# Altium PCB SharkPup R1.0.PcbDoc
Units mil, origin at the board's own origin, x right, y up, seen from the top; angles counter-clockwise.
Board outline 6000 x 4000 mil, 2 copper layers (Top Layer, Bottom Layer); 136 components, 95 nets, 489 pads, 92 vias.
Unrouted connection lines stored in the file: 210.
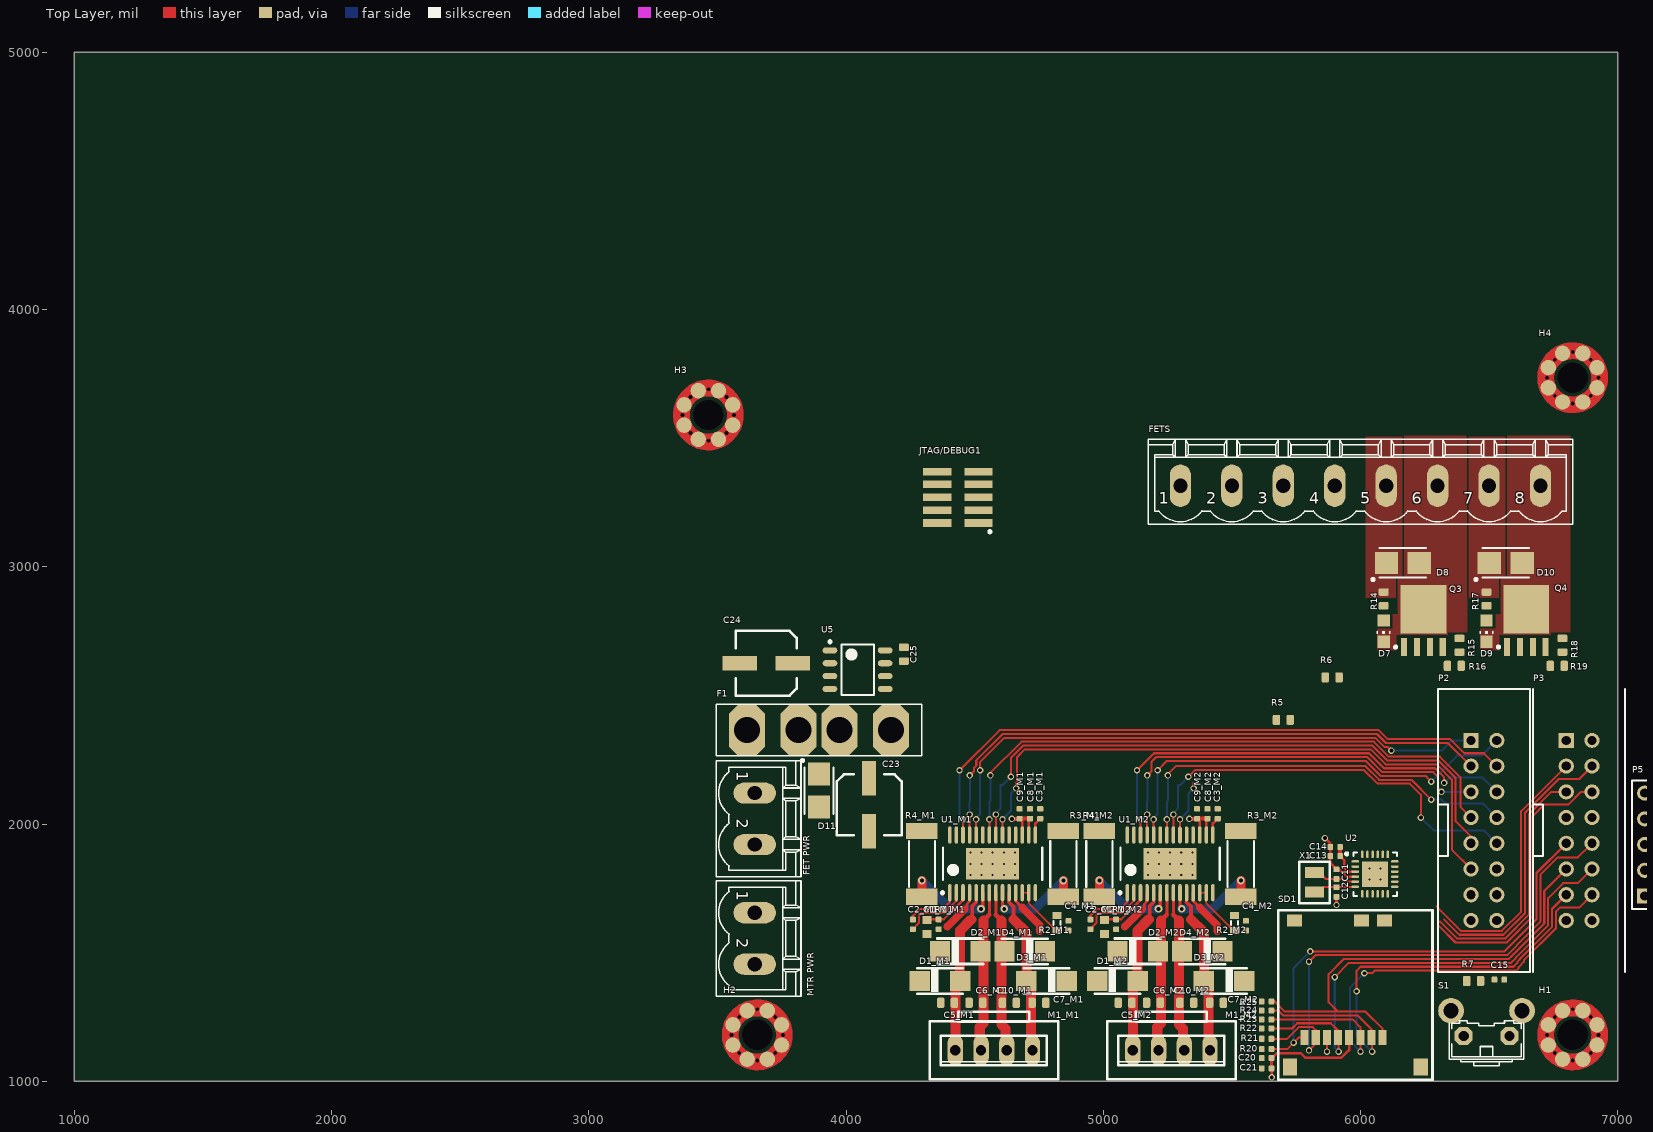
[diagram p0: Top Layer view]
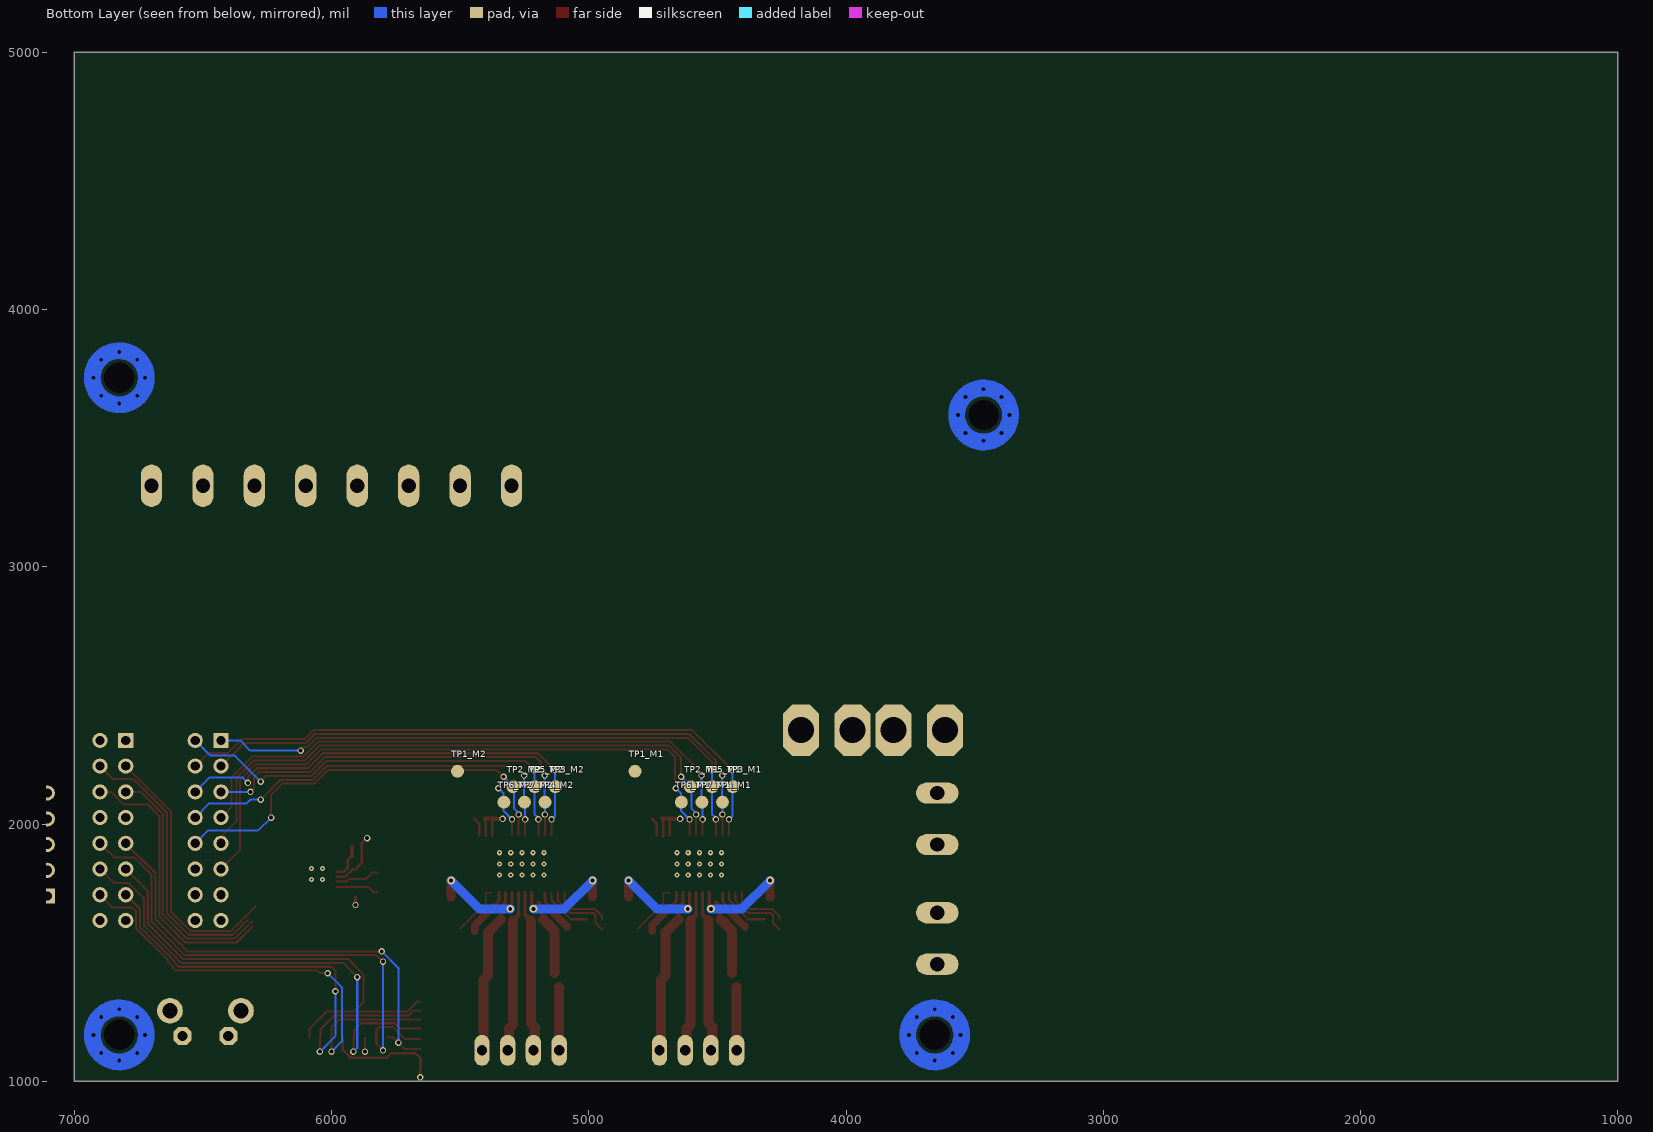
[diagram p1: Bottom Layer view, seen from below]

## Layer stack, top to bottom
Top Solder: solder mask 0.4, Solder Resist, Dk 3.5
Top Layer: signal copper 1.4
Dielectric 1: dielectric 12.6, FR-4, Dk 4.8
Bottom Layer: signal copper 1.4
Bottom Solder: solder mask 0.4, Solder Resist, Dk 3.5

## Board outline
1000,1000 7000,1000 7000,5000 1000,5000

## Design rules (kind name [scope] priority, off if disabled: settings)
Clearance [All] p1: gap=7
ComponentClearance [All] p1: gap=0 collisioncheckmode=3 verticalgap=10 showdistances=FALSE
FanoutControl Fanout_SOIC [(InComponent('U8') AND InComponent('U7'))] p3: bgadir=Out bgaviamode=Centered fanoutstyle=Staggered fanoutdirection=Alternating viagrid=1 // Fanout_SOIC (Default Rule)
FanoutControl Fanout_Small [All] p4: bgadir=Out bgaviamode=Centered fanoutstyle=Auto fanoutdirection=Alternating viagrid=1 // Fanout_Small (Default Rule)
HoleSize [All] p1: absolutevalues=TRUE maxlimit=200 minlimit=15 maxpercent=80.000 minpercent=20.000
MinimumSolderMaskSliver [All] p1 off: minsoldermaskwidth=10
PlaneConnect [All] p1: planeconnectstyle=Direct reliefexpansion=20 reliefentries=4 reliefconductorwidth=10 reliefairgap=10
PolygonConnect [All] p1: connectstyle=Direct reliefconductorwidth=45 reliefentries=4 polygonreliefangle="90 Angle" airgapwidth=10
RoomDefinition TC2 [InComponentClass('TC2')] p1: confinementstyle=ConfineIn formatcopy=TRUE lockcomponents=FALSE outline 7045,6465 8290,6465 8290,6885 7045,6885
RoomDefinition TC1 [InComponentClass('TC1')] p2: confinementstyle=ConfineIn formatcopy=TRUE lockcomponents=FALSE outline 7045,5995 8230,5995 8230,6415 7045,6415
RoomDefinition M2 [InComponentClass('M2')] p3: confinementstyle=ConfineIn formatcopy=TRUE lockcomponents=FALSE outline 5605,1000 5605,2270 4915,2270 4915,1000
RoomDefinition M1 [InComponentClass('M1')] p4: confinementstyle=ConfineIn formatcopy=TRUE lockcomponents=FALSE outline 4915,1000 4915,2270 4225,2270 4225,1000
RoutingVias [All] p1: holewidth=15 width=25 viastyle="Through Hole" minholewidth=15 minwidth=25 maxholewidth=28 maxwidth=50
SilkToSilkClearance [All] p1 off: silktosilkclearance=10
SilkToSolderMaskClearance SilkscreenOverComponentPads [IsPad] p1 off: minsilkscreentomaskgap=10 clearancetoexposedcopper=TRUE
SolderMaskExpansion [All] p1: expansion=4
UnpouredPolygon [All] p1: allowunpoured=FALSE
Width [All] p1: maxlimit=200 minlimit=7 preferedwidth=8 minimp=50.000000 maximp=50.000000 favimp=50.000000
21 further rules are at their usual default settings.

## Classes and differential pairs
net class STEP_BUS[1..2]: STEP_BUS1 STEP_BUS2
net class REF_BUS[1..2]: REF_BUS1 REF_BUS2
net class MOD2E_BUS[1..2]: MOD2E_BUS1 MOD2E_BUS2
net class MOD1E_BUS[1..2]: MOD1E_BUS1 MOD1E_BUS2
net class MOD0E_BUS[1..2]: MOD0E_BUS1 MOD0E_BUS2
net class EN_BUS[1..2]: EN_BUS1 EN_BUS2
net class DIR_BUS[1..2]: DIR_BUS1 DIR_BUS2
channel class TC: TC1 TC2
channel class M: M1 M2
net class TC_CS_BUS[1..2]: TC_CS_BUS1 TC_CS_BUS2
net class SCLK[1..2]: SCLK1 SCLK2
net class MISO[1..2]: MISO1 MISO2
component class "U_MOSFETs and Driver": C16 C17 C18 C19 D5 D6 D7 D8 D9 D10 FETS Q1 Q2 Q3 Q4 R8 R9 R10 R11 R12 R13 R14 R15 R16 R17 R18 R19 TP8 TP9 TP10 TP11 TP12 TP13 U3
component class "U_MCU MKL05 QFN24": C11 C12 C13 C14 C15 JTAG/DEBUG1 R5 R6 R7 S1 U2 X1
component class TC2: C22_TC2 T1_TC2 U4_TC2
component class TC1: C22_TC1 T1_TC1 U4_TC1
component class SharkPup-System: C20 C21 C23 C24 C25 D11 D13 F1 FD1 FD2 FD3 "FET PWR" H1 H2 H3 H4 "Motor Power1" "MTR PWR" P2 P3 P4 P5 R20 R21 R22 R23 R24 R25 SD1 TP14 TP15 U5
component class M2: C1_M2 C2_M2 C3_M2 C4_M2 C5_M2 C6_M2 C7_M2 C8_M2 C9_M2 C10_M2 D1_M2 D2_M2 D3_M2 D4_M2 M1_M2 R1_M2 R2_M2 R3_M2 R4_M2 TP1_M2 TP2_M2 TP3_M2 TP4_M2 TP5_M2 TP6_M2 TP7_M2 U1_M2
component class M1: C1_M1 C2_M1 C3_M1 C4_M1 C5_M1 C6_M1 C7_M1 C8_M1 C9_M1 C10_M1 D1_M1 D2_M1 D3_M1 D4_M1 M1_M1 R1_M1 R2_M1 R3_M1 R4_M1 TP1_M1 TP2_M1 TP3_M1 TP4_M1 TP5_M1 TP6_M1 TP7_M1 U1_M1

## Components (designator, comment, footprint, x,y, rotation, side; value= is the part's Value field where it differs from the comment)
C1_M1 "0603" 1608[0603] 4315,1600 r90 top (schematic designator C1)
C1_M2 "0603" 1608[0603] 5005,1600 r90 top (schematic designator C1)
C2_M1 "0402" C0402 4260,1610 r270 top (schematic designator C2)
C2_M2 "0402" C0402 4950,1610 r270 top (schematic designator C2)
C3_M1 "0402" C0402 4755,2040 r270 top (schematic designator C3)
C3_M2 "0402" C0402 5445,2040 r270 top (schematic designator C3)
C4_M1 "0402" C0402 4865,1605 r270 top (schematic designator C4)
C4_M2 "0402" C0402 5555,1605 r270 top (schematic designator C4)
C5_M1 "10uF" C0603 4395,1305 r180 top (schematic designator C5)
C5_M2 "10uF" C0603 5085,1305 r180 top (schematic designator C5)
C6_M1 "10uF" C0603 4505,1305 r180 top (schematic designator C6)
C6_M2 "10uF" C0603 5195,1305 r180 top (schematic designator C6)
C7_M1 "10uF" C0603 4750,1305 r0 top (schematic designator C7)
C7_M2 "10uF" C0603 5440,1305 r0 top (schematic designator C7)
C8_M1 "0402" C0402 4715,2040 r270 top (schematic designator C8)
C8_M2 "0402" C0402 5405,2040 r270 top (schematic designator C8)
C9_M1 "0402" C0402 4675,2040 r270 top (schematic designator C9)
C9_M2 "0402" C0402 5365,2040 r270 top (schematic designator C9)
C10_M1 "10uF" C0603 4635,1305 r0 top (schematic designator C10)
C10_M2 "10uF" C0603 5325,1305 r0 top (schematic designator C10)
C11 "0402" C0402 5906.77,1805.16 r270 top
C12 "0402" C0402 5906.77,1735.16 r90 top
C13 "0402" C0402 5901.77,1875.16 r0 top
C14 "0402" C0402 5901.77,1910.16 r0 top
C15 "0402" C0402 6540,1395 r180 top
C16 "0402" C0402 11740,4430 r90 top
C17 "0402" C0402 11960,4430 r90 top
C18 "0603" C0603 11310,4415 r90 top
C19 "0603" C0603 11530,4415 r90 top
C20 "0402" C0402 5635,1090 r0 top
C21 "0402" C0402 5635,1050 r0 top
C22_TC1 "0402" C0402 7075,6260 r90 top (schematic designator C22)
C22_TC2 "0402" C0402 7075,6730 r90 top (schematic designator C22)
C23 "EEE-1VA101XP" EEE-1VA101XP 4090,2075 r90 top
C24 "EEE-1VA101XP" EEE-1VA101XP 3690,2625 r0 top
C25 "100nF" C0603 4225,2660 r270 top
D1_M1 "SMAJ30A" SMA-SM 4365,1390 r0 top (schematic designator D1)
D1_M2 "SMAJ30A" SMA-SM 5055,1390 r0 top (schematic designator D1)
D2_M1 "SMAJ30A" SMA-SM 4444,1505 r0 top (schematic designator D2)
D2_M2 "SMAJ30A" SMA-SM 5134,1505 r0 top (schematic designator D2)
D3_M1 "SMAJ30A" SMA-SM 4780,1390 r180 top (schematic designator D3)
D3_M2 "SMAJ30A" SMA-SM 5470,1390 r180 top (schematic designator D3)
D4_M1 "SMAJ30A" SMA-SM 4695,1505 r180 top (schematic designator D4)
D4_M2 "SMAJ30A" SMA-SM 5385,1505 r180 top (schematic designator D4)
D5 "5988140107F" LED2012120 14640,4440 r0 top
D6 "5988140107F" LED2012120 13655,4440 r0 top
D7 "5988140107F" LED2012120 6090,2750 r270 top
D8 "B240A-13-F" SK310A-TP 6165,3015 r180 top
D9 "5988140107F" LED2012120 6490,2750 r270 top
D10 "B240A-13-F" SK310A-TP 6565,3015 r180 top
D11 "SK310A-TP" SK310A-TP 3895,2130 r90 top
F1 "3522-2" "3522-2 - WAVE SOLDER" 3895,2365 r0 top
FD1 "FIDUCIAL" FIDUCIAL-1X2 8855,1300 r0 top
FD2 "FIDUCIAL" FIDUCIAL-1X2 8390,1300 r0 top
FD3 "FIDUCIAL" FIDUCIAL-1X2 8625,1300 r0 top
"FET PWR" "con-phoenix-508 - 2" "MSTBV2 - duplicate" 3645,1820 r270 top
FETS "con-phoenix-508 - 8" MSTBV8 6000,3315 r90 top
H1 "Hole" Wave_hole_3x7-singleSided 6825,1180 r0 top
H2 "Hole" Wave_hole_3x7-singleSided 3655,1180 r0 top
H3 "Hole" Wave_hole_3x7-singleSided 3465,3590 r0 top
H4 "Hole" Wave_hole_3x7-singleSided 6825,3735 r0 top
JTAG/DEBUG1 "ARM Cortex JTAG-DEBUG" FTSH-105-XX-X-DV 4435,3270 r270 top
M1_M1 "Molex 0705430003" 4POL254 4575,1120 r180 top (schematic designator M1)
M1_M2 "Molex 0705430003" 4POL254 5265,1120 r180 top (schematic designator M1)
"MTR PWR" "con-phoenix-508 - 2" "MSTBV2 - duplicate" 3645,1355 r270 top
P2 "302-S161" 302-S161 6530,2325 r270 top
P3 "302-S161" 302-S161 6900,2325 r270 top
P4 "Header 2X2" HDR2X2 7935,1970 r90 top
P5 "Header 5" HDR1X5 7105,1720 r90 top
Q1 "IRML6346TRPBF" IRLML6346 14270,4385 r0 top
Q2 "IRML6346TRPBF" IRLML6346 11140,5500 r90 top
Q3 "PSMN7R0-60YS" PSMN7R0-60YS 6245,2790 r90 top
Q4 "PSMN7R0-60YS" PSMN7R0-60YS 6645,2790 r90 top
R1_M1 "1M" R0402 4360,1610 r270 top (schematic designator R1)
R1_M2 "1M" R0402 5050,1610 r270 top (schematic designator R1)
R2_M1 "0603" J1-0603 4820,1615 r90 top (schematic designator R2)
R2_M2 "0603" J1-0603 5510,1615 r90 top (schematic designator R2)
R3_M1 "2512" Resistor2512 4845,1845 r270 top (schematic designator R3)
R3_M2 "2512" Resistor2512 5535,1845 r270 top (schematic designator R3)
R4_M1 "2512" Resistor2512 4295,1845 r270 top (schematic designator R4)
R4_M2 "2512" Resistor2512 4985,1845 r270 top (schematic designator R4)
R5 "1K" R0603 5700,2405 r0 top
R6 "1K" R0603 5890,2570 r0 top
R7 "1K" R0603 6440,1390 r0 top
R8 "1.8K" R0603 14810,4440 r0 top
R9 "10r" R0603 14450,4440 r0 top
R10 "100K" R0603 14005,4415 r90 top
R11 "1.8K" R0603 13825,4440 r0 top
R12 "10r" R0603 13395,4415 r90 top
R13 "100K" R0603 10430,5150 r180 top
R14 "1.8K" R0603 6090,2875 r90 top
R15 "10r" R0603 6385,2695 r90 top
R16 "100K" R0603 6365,2615 r180 top
R17 "1.8K" R0603 6490,2875 r90 top
R18 "10r" R0603 6785,2695 r90 top
R19 "100K" R0603 6765,2615 r180 top
R20 "2.7K" R0402 5635,1125 r180 top
R21 "2.7K" R0402 5635,1165 r180 top
R22 "2.7K" R0402 5635,1205 r180 top
R23 "2.7K" R0402 5635,1240 r180 top
R24 "2.7K" R0402 5635,1275 r180 top
R25 "2.7K" R0402 5635,1310 r180 top
S1 "1571610-2" B3F-31XX 6490,1225 r0 top
SD1 "502570-0893" "502570-0893 - Molex SD" 5980,1335 r180 top
T1_TC1 "Molex 70543-02" 70543-02 8050,6180 r0 top (schematic designator T1)
T1_TC2 "Molex 70543-02" 70543-02 8090,6650 r0 top (schematic designator T1)
TP1_M1 "TP4" TP-2 4820,2205 r90 bottom (schematic designator TP1)
TP1_M2 "TP4" TP-2 5510,2205 r90 bottom (schematic designator TP1)
TP2_M1 "TP4" TP-2 4605,2145 r0 bottom (schematic designator TP2)
TP2_M2 "TP4" TP-2 5295,2145 r0 bottom (schematic designator TP2)
TP3_M1 "TP4" TP-2 4440,2145 r90 bottom (schematic designator TP3)
TP3_M2 "TP4" TP-2 5130,2145 r90 bottom (schematic designator TP3)
TP4_M1 "TP4" TP-2 4480,2085 r90 bottom (schematic designator TP4)
TP4_M2 "TP4" TP-2 5170,2085 r90 bottom (schematic designator TP4)
TP5_M1 "TP4" TP-2 4520,2145 r90 bottom (schematic designator TP5)
TP5_M2 "TP4" TP-2 5210,2145 r90 bottom (schematic designator TP5)
TP6_M1 "TP4" TP-2 4640,2085 r90 bottom (schematic designator TP6)
TP6_M2 "TP4" TP-2 5330,2085 r90 bottom (schematic designator TP6)
TP7_M1 "TP4" TP-2 4560,2085 r90 bottom (schematic designator TP7)
TP7_M2 "TP4" TP-2 5250,2085 r90 bottom (schematic designator TP7)
TP8 "TP4" TP-2 12190,4440 r90 top
TP9 "TP4" TP-2 12420,4440 r90 top
TP10 "TP4" TP-2 12650,4440 r90 top
TP11 "TP4" TP-2 12930,4440 r90 top
TP12 "TP4" TP-2 8995,4440 r90 top
TP13 "TP4" TP-2 7300,4440 r90 top
TP14 "TP4" TP-2 7530,2145 r90 top
TP15 "TP4" TP-2 7250,2145 r90 top
U1_M1 "DRV8825" DRV8825 4570,1845 r90 top (schematic designator U1)
U1_M2 "DRV8825" DRV8825 5260,1845 r90 top (schematic designator U1)
U2 "MKL05Z16VFK4 - VQFN24" 98ASA00474D 6056.77,1805.16 r0 top
U3 "TXS0104E Level Shifter" "RGY  (S-PVQFN-N14)" 11135,4370 r0 top
U4_TC1 "MAX31855EASA+" MAXM-S8+4_N 7620,6150 r90 top (schematic designator U4)
U4_TC2 "MAX31855EASA+" MAXM-S8+4_N 7640,6620 r90 top (schematic designator U4)
U5 "L78L05ABD13TR" L78L05ABD13TR 4045,2600 r0 top
X1 "ABS07-32.768KHZ-T" ABS07-32.768KHZ-T 5821.77,1735.16 r90 top

## Footprints (in the part's own frame and the unit in brackets; to place one, negate y for a bottom-side part, rotate by r counter-clockwise, add the part's x,y. Pads: shape width x height; smd on the part's side, far side on the other; paste and mask are expansions set on the pad)
4POL254 [mil]
  oval 60x120 hole 40: 1(-150,0) 2(-50,0) 3(50,0) 4(150,0)
  silkscreen extent -250,-150 250,113, body extent -250,-150 250,113, height 454
98ASA00474D [mm] "QFN, 24-Leads, Body 3.98x3.98mm, Pitch 0.50mm, Thermal Pad 2.80x2.80mm, IPC Medium Density"
  oval 0.75x0.25 smd: 1(-1.95,1.25) 2(-1.95,0.75) 3(-1.95,0.25) 4(-1.95,-0.25) 5(-1.95,-0.75) 6(-1.95,-1.25) 13(1.95,-1.25) 14(1.95,-0.75) 15(1.95,-0.25) 16(1.95,0.25) 17(1.95,0.75) 18(1.95,1.25)
  oval 0.25x0.75 smd: 7(-1.25,-1.95) 8(-0.75,-1.95) 9(-0.25,-1.95) 10(0.25,-1.95) 11(0.75,-1.95) 12(1.25,-1.95) 19(1.25,1.95) 20(0.75,1.95) 21(0.25,1.95) 22(-0.25,1.95) 23(-0.75,1.95) 24(-1.25,1.95)
  rect 2.54x2.54 smd: 25(0,0)
  silkscreen extent -2.92,-2.15 2.15,2.15, body extent -2,-2 2,2, height 1
302-S161 [mm] "2.54mm pitch 2X8 1 Pin Shrouded Connector"
  rect 1.5x1.5 hole 0.9: 1(0,-2.54)
  round 1.5 hole 0.9: 2(0,0) 3(2.54,-2.54) 4(2.54,0) 5(5.08,-2.54) 6(5.08,0) 7(7.62,-2.54) 8(7.62,0) 9(10.16,-2.54) 10(10.16,0) 11(12.7,-2.54) 12(12.7,0) 13(15.24,-2.54) 14(15.24,0) 15(17.78,-2.54) 16(17.78,0)
  silkscreen extent -5.08,-5.82 22.86,3.28, body extent -5.08,-5.84 22.86,3.3, height 9.1
1608[0603] [mm] "Chip Capacitor, Body 1.6x0.8mm, IPC High Density"
  rect 0.8x0.9 smd: 1(-0.7,0) 2(0.7,0)
  body extent -0.87,-0.48 0.87,0.48, height 1.3
"3522-2 - WAVE SOLDER" [mil]
  oct 140x200 hole 100: 1(-280,0) 1(-80,0) 2(80,0) 2(280,0)
  silkscreen extent -400,-100 400,100, body extent -402,-102 402,102, height 709
70543-02 [mil]
  oval 60x120 hole 40: 1(-50,0) 2(50,0)
  silkscreen extent -150,-150 150,113, body extent -150,-150 150,113, height 450
"502570-0893 - Molex SD" [mm] "Molex SD Card Footprint 502570-0893"
  rect 0.8x1.5 smd: 1(-2.692,4.191) 2(-1.592,4.191) 3(-0.492,4.191) 4(0.608,4.191) 5(1.708,4.191) 6(2.808,4.191) 7(3.908,4.191) 8(5.008,4.191)
  rect 1.4x1.7 smd: 9(-6.452,7.112) 10(6.452,7.112)
  rect 1.5x1.15 smd: 11(-2.896,-7.366) 12(-0.61,-7.366) 13(5.994,-7.366)
  silkscreen extent -7.62,-8.38 7.62,8.38, body extent -6.86,-7.75 6.94,7.75, height 1.85
ABS07-32.768KHZ-T [mm] "ABS07-32.768KHZ-T Crystal Oscillator"
  rect 1.1x1.9 smd: 1(0,0) 2(1.95,0)
  silkscreen extent -1.1,-1.5 3,1.5
B3F-31XX [mil]
  oct 70x70 hole 40: 1(-89,-49) 2(89,-49)
  round 100 hole 59: 3(-138,49) 4(138,49)
  silkscreen extent -145,-165 145,10, body extent -165,-200 165,109, height 303
C0402 [mil]
  rrect40% 22x24 smd: 1(-18.7,0) 2(19,0)
  body extent -20,-10 20,10, height 20
C0603 [mm]
  rrect40% 0.74x1 smd: 1(-0.68,0) 2(0.68,0)
  body extent -0.8,-0.4 0.8,0.4, height 0.8
DRV8825 [mm] "TSOP, 28-Leads, Body 9.70x4.40mm, Pitch 0.65mm, Thermal Pad 5.22.2x3.10.2mm, IPC Medium Density"
  oval 1.7x0.35 smd: 1(-2.85,4.225) 2(-2.85,3.575) 3(-2.85,2.925) 4(-2.85,2.275) 5(-2.85,1.625) 6(-2.85,0.975) 7(-2.85,0.325) 8(-2.85,-0.325) 9(-2.85,-0.975) 10(-2.85,-1.625) 11(-2.85,-2.275) 12(-2.85,-2.925) 13(-2.85,-3.575) 14(-2.85,-4.225) 15(2.85,-4.225) 16(2.85,-3.575) 17(2.85,-2.925) 18(2.85,-2.275) 19(2.85,-1.625) 20(2.85,-0.975) 21(2.85,-0.325) 22(2.85,0.325) 23(2.85,0.975) 24(2.85,1.625) 25(2.85,2.275) 26(2.85,2.925) 27(2.85,3.575) 28(2.85,4.225)
  rect 3.1x5.22 smd: 29(0,0)
  silkscreen extent -2.97,-4.9 1.6,5.07, body extent -2.25,-4.9 2.25,4.9, height 1.2
EEE-1VA101XP [mm] "Panasonic VS D EEE-1VA101XP"
  rect 3.4x1.4 smd: 1(2.6,0) 2(-2.6,0)
  silkscreen extent -3,-3.2 3,3.2, body extent -3.5,-3.3 3.5,3.3, height 5.4
FIDUCIAL-1X2 [mil]
  rrect100% 40x40 smd paste-3897.64 mask+20: 1(0,0)
  body extent -40,-40 40,40, height 1
FTSH-105-XX-X-DV [mm] "1.27mm pitch, 10 pin, terminal strip; vertical, SMT"
  rect 0.75x2.8 smd mask+0: 1(2.54,2.03) 2(2.54,-2.03) 3(1.27,2.03) 4(1.27,-2.03) 5(0,2.03) 6(0,-2.03) 7(-1.27,2.03) 8(-1.27,-2.03) 9(-2.54,2.03) 10(-2.54,-2.03)
  silkscreen extent 3.28,3.03 3.52,3.27
HDR1X5 [mm] "Connector; Header; 5 Position"
  rect 1.5x1.5 hole 0.9: 1(0,0)
  round 1.5 hole 0.9: 2(2.54,0) 3(5.08,0) 4(7.62,0) 5(10.16,0)
  silkscreen extent -1.27,-1.27 11.43,1.27
HDR2X2 [mm] "Connector; Header; 2x2 Position"
  rect 1.5x1.5 hole 0.9: 1(0,0)
  round 1.5 hole 0.9: 2(0,2.54) 3(2.54,0) 4(2.54,2.54)
  silkscreen extent -1.27,-1.27 3.81,3.81
IRLML6346 [mm] "SOT23, 3-Leads, Body 2.92x2.37mm, Pitch 0.95mm, IPC Medium Density"
  rect 1.6x0.6 smd: 1(-0.9,0.95) 2(-0.9,-0.95) 3(0.9,0)
  silkscreen extent -1.02,-1.5 0.7,1.92, body extent -0.7,-1.52 0.7,1.52, height 1.12
J1-0603 [mm] "Chip Resistor, Body 1.6x0.8mm, IPC High Density"
  rect 0.7x0.9 smd: 1(-0.75,0) 2(0.75,0)
  silkscreen extent -0.2,-0.35 0.2,0.35, body extent -0.85,-0.48 0.85,0.48, height 0.9
L78L05ABD13TR [mm] "SOIC, 8-Leads, Body 4.90x3.90mm, Pitch 1.27mm, IPC Medium Density"
  oval 1.45x0.6 smd: 1(-2.725,1.905) 2(-2.725,0.635) 3(-2.725,-0.635) 4(-2.725,-1.905) 5(2.725,-1.905) 6(2.725,-0.635) 7(2.725,0.635) 8(2.725,1.905)
  silkscreen extent -2.85,-2.5 1.6,2.88, body extent -2,-2.5 2,2.5, height 1.75
LED2012120 [mil]
  rect 48x48 smd: A(-41.34,0) C(42,0)
  silkscreen extent 0,-27 12,27, body extent -50,-25 50,25, height 28
MAXM-S8+4_N [mm]
  oval 2.2x0.6 smd: 1(-2.4,1.905) 2(-2.4,0.635) 3(-2.4,-0.635) 4(-2.4,-1.905) 5(2.4,-1.905) 6(2.4,-0.635) 7(2.4,0.635) 8(2.4,1.905)
  silkscreen extent -2.52,-2.5 0.9,2.88, body extent -2,-2.5 2,2.5, height 1.75
"MSTBV2 - duplicate" [mil]
  oval 82.5x165 hole 55: 1(-300,0) 2(-100,0)
  silkscreen extent -425,-150 25,180, body extent -425,-150 25,180, height 472
MSTBV8 [mil]
  oval 165x82.5 hole 55: 1(0,700) 2(0,500) 3(0,300) 4(0,100) 5(0,-100) 6(0,-300) 7(0,-500) 8(0,-700)
  silkscreen extent -150,-825 180,825, body extent -150,-825 180,825, height 472
PSMN7R0-60YS [mm]
  rect 1.8x0.6 smd: 1(-2.6,1.905) 2(-2.6,0.635) 3(-2.6,-0.635) 4(-2.6,-1.905)
  rect 4.8x4.5 smd: 5(1.14,0)
  silkscreen extent -2.72,2.63 -2.48,2.88, body extent -1.85,-2.5 2.25,2.5, height 1.2
R0402 [mil]
  rrect40% 22x24 smd: 1(-18.9,0) 2(19,0)
  body extent -20,-10 20,10, height 14
R0603 [mm]
  rrect40% 0.74x1 smd: 1(-0.68,0) 2(0.68,0)
  body extent -0.8,-0.4 0.8,0.4, height 0.8
Resistor2512 [mm]
  rect 1.6x3.1 smd: 1(-3.25,0) 2(3.25,0)
  silkscreen extent -2.26,-1.3 2.26,1.3, body extent -3.24,-1.4 3.24,1.4, height 0.9
"RGY  (S-PVQFN-N14)" [mm] "QFN, 16-Leads, Body 3.50x3.50mm, Pitch 0.50mm, Thermal Pad 2.00x2.00mm, IPC Medium Density"
  oval 0.8x0.2 smd: 1(-1.75,0.5) 7(1.75,0.5) 8(1.75,-0.5) 14(-1.75,-0.5)
  oval 0.2x0.8 smd: 2(-1,1.75) 3(-0.5,1.75) 4(0,1.75) 5(0.5,1.75) 6(1,1.75) 9(1,-1.75) 10(0.5,-1.75) 11(0,-1.75) 12(-0.5,-1.75) 13(-1,-1.75)
  rect 2x2 smd: 15(0,0)
  silkscreen extent -2.75,-1.97 1.97,1.97, body extent -1.83,-1.83 1.83,1.83, height 1
SK310A-TP [mm] "Molded Diode, 2-Leads, Body 4.31x2.69mm, IPC Medium Density"
  rect 2.3x2.15 smd: 1(-1.625,0) 2(1.625,0)
  silkscreen extent -2.3,-1.45 3.07,1.75, body extent -2.29,-1.42 2.28,1.42, height 2.95
SMA-SM [mil]
  rect 79x79 smd: A(79,0) C(-78.74,0)
  silkscreen extent -89,-49 89,50, body extent -105,-54 105,55, height 116
TP-2 [mil]
  round 50 smd: 1(0,0)
Wave_hole_3x7-singleSided [mil]
  round 0 hole 118.11 unplated paste+0 mask-112: 0(0,0)
  round 0 hole 15 paste-20 mask-20: 1(-100,0) 1(-70,-70) 1(-70,70) 1(0,-100) 1(0,100) 1(70,-70) 1(70,70) 1(100,0)
  round 60 smd paste-5 mask+0: 1(-94.49,-39.37) 1(-94.49,39.37) 1(-39.37,-94.49) 1(-39.37,94.49) 1(39.37,-94.49) 1(39.37,94.49) 1(94.49,-39.37) 1(94.49,39.37)
  Top Layer circle w64.96: c0,0 r105
  Bottom Layer circle w64.96: c0,0 r105
  body extent -105,-105 105,105

## Part data
C1_M1 C1_M2: library part "Cap Semi", "Capacitor (Semiconductor SIM Model)"
C2_M1 C2_M2: library part GRM155R71H103JA88D, "CAP CER 10000PF 50V X7R 0402"
C3_M1 C3_M2: library part GRM155R60J474KE19D, "0.47uF 6.3v C0402 - GRM155R60J474KE19D"
C4_M1 C4_M2 C8_M1 C8_M2 C9_M1 C9_M2 C22_TC1 C22_TC2: library part "100nF C0402 - GRM155R71C104KA88D", "Capacitor (Semiconductor SIM Model)"
C5_M1 C5_M2 C6_M1 C6_M2 C7_M1 C7_M2 C10_M1 C10_M2: library part CC0603ZRY5V6BB105, "CAP CER 0603 1uF 10V Y5V"
C11 C12: library part CL05C180GB5NNNC, "CAP CER 18PF 50V 2% NP0 0402"
C13 C21: library part GRM155R60J105KE19D, "CAP CER 1UF 6.3V 10% X5R 0402"
C14 C15 C16 C17 C20: library part GRM155R71C104KA88D, "CAP CER 0.1UF (100nF) 16V 10% X7R 0402"
C18 C19: library part C1608JB0J106K080AB, "CAP CER 10UF 6.3V 10% JB 0603"
C23 C24: "CAP ALUM 100UF 35V 20% SMD"
C25: library part C0603C104K5RACTU, "CAP CER 0603 100nF 50V 10% X7R"
D1_M1 D1_M2 D2_M1 D2_M2 D3_M1 D3_M2 D4_M1 D4_M2: "DIODE TVS 30V SMA"
D5 D6 D7 D9: "LED 0805 Yellow"
D8 D10 D11: library part "D Schottky", "Schottky Diode"
F1: library part "Fuse 1", "Fuse"
"FET PWR" "MTR PWR": library part con-phoenix-508_2
FETS: library part con-phoenix-508
JTAG/DEBUG1: library part "ARM Cortex JTAG-DEBUG Header"
M1_M1 M1_M2: library part "Molex 0705430003 Alt", "Molex 4 Pin Clip Connector"
P2 P3: "16 Pos 2.54mm Pin Connector Shrouded"
P4: "Header, 2-Pin, Dual row"
P5: "Header, 5-Pin"
Q1 Q2 Q3 Q4: "N-Channel MOSFET"
R1_M1 R1_M2: library part ERJ2GEJ105X, "RES 0402 1M 100mW 5%"
R2_M1 R2_M2 R3_M1 R3_M2 R4_M1 R4_M2: library part Res3, "Resistor"
R5 R6 R7: library part ERJ-3EKF1001V, "RES 0603 1K 100mW 1%"
R8 R11 R14 R17: library part RC0603JR-071K8L, "RES 0603 1.8K 100mW 5%"
R9 R12 R15 R18: library part CRCW060310R0FKEA, "RES 0603 10r 100mW 1%"
R10 R13 R16 R19: library part RC0603FR-07100KL, "RES 100K OHM 1/10W 1% 0603 SMD"
R20 R21 R22 R23 R24 R25: library part ERJ-2RKF2701X, "RES SMD 2.7K OHM 1% 1/10W 0402"
S1: library part 1571610-2_1, "SWTCH Momentary Washable"
SD1: "microSD 502570-0893 Molex Part"
TP1_M1 TP1_M2 TP2_M1 TP2_M2 TP3_M1 TP3_M2 TP4_M1 TP4_M2 TP5_M1 TP5_M2 TP6_M1 TP6_M2 TP7_M1 TP7_M2 TP8 TP9 TP10 TP11 TP12 TP13 TP14 TP15: library part Socket, "Socket"
U1_M1 U1_M2: "DRV8825 Ti Stepper Driver"
U2: library part "MKL05Z16VFK4 - 24 Pin VQFN", "ARM Cortex M0+"
U3: library part TXS0104E, "TXS0104E - Bidriectional Opendrain/pushpull level shift"
U4_TC1 U4_TC2: "Cold Junction Compensated Thermocouple to Digital Converter, 14 Bits Temperature Resolution, -40 to 125 degC, 8-Pin SOIC (S8+4), Pb-Free"
U5: "IC REG LDO 5V 0.1A 8SO"
X1: "ABS07-32.768KHZ-T RTC Crystal Oscillator"

## Via types
v1: diameter 25, hole 15, Top Layer to Bottom Layer, tented both sides, 46 vias
v2: diameter 19.68, hole 7.87, Top Layer to Bottom Layer, 38 vias
v3: diameter 30, hole 15, Top Layer to Bottom Layer, tented both sides, 8 vias

## Nets (pads, with @x,y where several pads share a name; then routed paths per layer and width w, separated by ;. In a path a pad name is that pad's centre, name@x,y a point inside that pad or via, vN(x,y) a via of type N, cw(c..) or ccw(c..) an arc to the next point about the centre after c; other vN are vias at no path point)
3.3VCC: C8_M1.2 C8_M2.2 C9_M1.2 C9_M2.2 C13.2 C14.2 C16.2 C18.2 C20.2 C21.2 C22_TC1.2 C22_TC2.2 JTAG/DEBUG1.1 P2.16 P3.16 P5.5 R5.1 R6.2 R7.2 R20.2 R21.2 R22.2 R23.2 R24.2 R25.2 SD1.4 U1_M1.16 U1_M1.17 U1_M2.16 U1_M2.17 U2.3 U3.1 U3.8 U4_TC1.4 U4_TC2.4 | length 993.3
  Top Layer w10: C9_M1.2@4676,2020 4685.16,2010.84 U1_M1.17 ; U1_M1.16@4710,1952.2 C8_M1.2@4710,2016 ; C9_M2.2@5366,2020 5375.16,2010.84 U1_M2.17 ; U1_M2.16@5400,1952.2 C8_M2.2@5400,2016 ; v1(5655,1015) 5655,1049 C21.2 C20.2 5656.29,1090 5675.29,1109 5767.85,1109 5786.35,1090.5 5925.15,1090.5 5956.06,1121.41 SD1.4 ; C13.2 5936.77,1859.16 5936.77,1830.16 5951.93,1815 U2.3
  Top Layer w15: v1(4645,2020) C9_M1.2@4676,2020 ; C9_M1.2 C8_M1.2 ; v1(5335,2020) C9_M2.2@5366,2020 ; C9_M2.2 C8_M2.2 ; C13.2 C14.2
5VCC: C24.1 U5.1
+5VCC: C17.2 C19.2 U3.14
+12VCC1: "MTR PWR.1" C1_M1.1 C1_M2.1 R1_M1.2 R1_M2.2 U1_M1.4 U1_M1.11 U1_M2.4 U1_M2.11 | length 709.1
  Top Layer w12: 4461.26,1668.74 4470.26,1677.74 4470.26,1689.25 4480.43,1699.42 U1_M1.4@4480.43,1731.8 ; U1_M1.11 4659.57,1700.43 4685,1675 ; 5151.26,1668.74 5160.26,1677.74 5160.26,1689.25 5170.43,1699.42 U1_M2.4@5170.43,1731.8 ; U1_M2.11 5349.57,1700.43 5375,1675
  Top Layer w30: 4393.74,1601.22 4461.26,1668.74 ; 4685,1675 4753.74,1606.26 4753.74,1583.74 ; 5083.74,1601.22 5151.26,1668.74 ; 5375,1675 5443.74,1606.26 5443.74,1583.74
+12VCC2: C23.1 C25.1 D8.2 D10.2 D11.2 F1.2 FETS.1 FETS.3 FETS.5 FETS.7 R8.2 R11.2 R14.2 R17.2
DIR1: P2.11 TP6_M1.1 U1_M1.20 | length 2456
  Top Layer w8: U1_M1.20 v1(4608.39,2017.64) ; v1(4661.26,2138.74) 4661.26,2161.26 4664.76,2164.76 4664.76,2259.76 4695,2290 6039.57,2290 6097.84,2231.73 6295.84,2231.73 6355,2172.57 6355,1900 P2.11
  Bottom Layer w8: v1(4608.39,2017.64) 4641.23,2050.48 4641.23,2118.71 v1(4661.26,2138.74)
DIR2: P2.12 TP6_M2.1 U1_M2.20 | length 226
  Top Layer w8: U1_M2.20 v1(5298.39,2017.64) ; v1(5351.26,2138.74) 5351.26,2161.26
  Bottom Layer w8: v1(5298.39,2017.64) 5331.23,2050.48 5331.23,2090.77 5331.23,2118.71 v1(5351.26,2138.74)
EN1: P2.9 TP2_M1.1 U1_M1.21 | length 2408
  Top Layer w8: U1_M1.21 v1(4582.8,2037.05) ; v1(4641.26,2183.74) 4641.26,2257.47 4688.79,2305 6045.78,2305 6104.05,2246.73 6302.06,2246.73 6370,2178.79 6370,2010 6430,1950 P2.9
  Bottom Layer w8: v1(4582.8,2037.05) 4582.8,2042.34 4601.23,2060.77 4601.23,2150.77 4608.29,2150.77 v1(4641.26,2183.74)
EN2: P2.10 TP2_M2.1 U1_M2.21 | length 1634.6
  Top Layer w8: U1_M2.21 v1(5272.8,2037.05) ; v1(5331.26,2183.74) 5357.52,2210 6013.5,2210 6066.77,2156.73 6192.06,2156.73 6235,2113.79 v1(6235,2025)
  Bottom Layer w8: v1(5272.8,2037.05) 5272.8,2042.34 5291.23,2060.77 5291.23,2150.77 5298.29,2150.77 v1(5331.26,2183.74) ; v1(6235,2025) 6285,1975 6480,1975 P2.10
EXP_CS2: P3.5 U2.18 | length 981.9
  Top Layer w8: 6310,1620 6375.53,1554.47 6561.9,1554.47 6654.47,1647.05 6654.47,2037.05 6742.43,2125 P3.5
FGND: H1.1 H2.1 H3.1 H4.1
GND: "FET PWR.2" "MTR PWR.2" C3_M1.1 C3_M2.1 C4_M1.1 C4_M2.1 C5_M1.2 C5_M2.2 C6_M1.2 C6_M2.2 C7_M1.2 C7_M2.2 C8_M1.1 C8_M2.1 C9_M1.1 C9_M2.1 C10_M1.2 C10_M2.2 C11.1 C12.1 C13.1 C14.1 C15.1 C16.1 C17.1 C18.1 C19.1 C20.1 C21.1 C22_TC1.1 C22_TC2.1 C23.2 C24.2 C25.2 D1_M1.C D1_M2.C D2_M1.C D2_M2.C D3_M1.C D3_M2.C D4_M1.C D4_M2.C D11.1 JTAG/DEBUG1.3 JTAG/DEBUG1.5 JTAG/DEBUG1.9 P2.15 P3.15 P5.4 Q1.2 Q2.2 Q3.1 Q3.2 Q3.3 Q4.1 Q4.2 Q4.3 R3_M1.1 R3_M2.1 R4_M1.1 R4_M2.1 R10.2 R13.2 R16.2 R19.2 S1.2 SD1.6 SD1.9 SD1.10 SD1.11 SD1.12 SD1.13 U1_M1.14 U1_M1.28 U1_M1.29 U1_M2.14 U1_M2.28 U1_M2.29 U2.4 U2.25 U3.7 U4_TC1.1 U4_TC2.1 U5.2 U5.3 U5.6 U5.7 | length 311.5
  Top Layer w8: SD1.6 5869.45,1115.55 v1(5870,1115)
  Top Layer w10: v1(5861.77,1945.16) 5883.07,1923.86 C14.1 C13.1 5883.07,1847.56 C11.1 5918.07,1823.86 5946.61,1795.31 U2.4 ; v1(5906.77,1685.16) C12.1
  other v2: 6035.12,1783.5 6078.43,1783.5 4483.39,1801.69 4526.69,1801.69 4570,1801.69 4613.31,1801.69 4656.61,1801.69 5173.39,1801.69 5216.69,1801.69 5260,1801.69 5303.31,1801.69 5346.61,1801.69 6035.12,1826.81 6078.43,1826.81 4483.39,1845 4526.69,1845 4570,1845 4613.31,1845 4656.61,1845 5173.39,1845 5216.69,1845 5260,1845 5303.31,1845 5346.61,1845 4483.39,1888.31 4526.69,1888.31 4570,1888.31 4613.31,1888.31 4656.61,1888.31 5173.39,1888.31 5216.69,1888.31 5260,1888.31 5303.31,1888.31 5346.61,1888.31
I2C_SCL: P3.1
I2C_SDA: P3.2
MCCDZ: P3.14 R23.1 SD1.3 | length 1847.3
  Top Layer w8: R23.1 5653.9,1240.53 5969.47,1240.53 5999.37,1210.63 SD1.3 5999.37,1115.63 v1(6000,1115) ; v1(6015,1420) 6045,1420 6055,1430 6605,1430 6615,1440 6615,1443.79 6635,1463.79 6635,1470 6760,1595 6760,1607.69 6759.47,1608.21 6759.47,1659.47 6775,1675 6850,1675 P3.14@6895,1720
  Bottom Layer w8: v1(6000,1115) 5960,1155 5960,1365 v1(6015,1420)
MCCK: P3.12 R22.1 SD1.5 | length 1888.2
  Top Layer w8: R22.1 5733.79,1205 5754.31,1225.53 5884.47,1225.53 5912.76,1197.24 SD1.5 5915,1167.76 v1(5915,1115) ; v1(5900,1405) 5955,1460 6585,1460 6605,1480 6605,1482.43 6729.47,1606.9 6729.47,1711.79 6787.69,1770 6845,1770 P3.12@6895,1820
  Bottom Layer w8: v1(5900,1405) 5900,1130 v1(5915,1115)
MCDZ0: P3.10 R21.1 SD1.7 | length 2021.7
  Top Layer w8: R21.1 5715,1165 5760.53,1210.53 5814.47,1210.53 5826.14,1198.86 SD1.7 5826.14,1146.14 v1(5800,1120) ; v1(5800,1465) 5825,1490 6570,1490 6645,1565 ; 6645.15,1565 6699.47,1619.33 6699.47,1803.26 6766.21,1870 6845,1870 P3.10@6895,1920
  Bottom Layer w8: v1(5800,1120) v1(5800,1465)
MCDZ1: P3.9 R20.1 SD1.8 | length 1798.6
  Top Layer w8: R20.1 5715,1125 5760,1170 SD1.8 ; v1(5805,1505) 6560,1505 6684.47,1629.47 6684.47,1809.47 P3.9@6795,1920
  Bottom Layer w8: v1(5740,1150) 5740,1435.67 5737.83,1437.83 v1(5805,1505)
MCDZ2: P3.11 R25.1 SD1.1 | length 1829.7
  Top Layer w8: R25.1 5666.74,1310 5706.21,1270.53 6019.47,1270.53 6086,1204 SD1.1 ; 5912.19,1271.25 5876.5,1306.94 5876.5,1416.5 5935,1475 6576.36,1475 6714.47,1613.11 6714.47,1739.47 P3.11@6795,1820
MCDZ3: P3.13 R24.1 SD1.2 | length 1831.5
  Top Layer w8: R24.1 5680.53,1275 5700,1255.53 5989.47,1255.53 6042.69,1202.31 SD1.2 6045,1167.69 v1(6045,1115) ; v1(5985,1350) 5985,1430 6000,1445 6595,1445 6610,1460 6610,1463.79 6620,1473.79 6620,1476.21 6745,1601.21 6745,1601.47 6744.47,1602 6744.47,1669.47 6795,1720 P3.13@6795,1710
  Bottom Layer w8: v1(5985,1350) 5985,1175 v1(6045,1115)
MISO: P3.4 U2.16 | length 1100.4
  Top Layer w8: 6324.39,1629.39 6384.31,1569.47 6555.69,1569.47 6639.47,1653.26 6639.47,2043.26 6771.21,2175 6850,2175 P3.4
MOD0E1: P2.1 TP5_M1.1 U1_M1.24 | length 2275
  Top Layer w8: U1_M1.24 v1(4506.02,2017.64) ; v1(4521.26,2208.74) 4521.26,2241.26 4615,2335 6058.21,2335 6093.21,2300 6105.23,2300 v1(6120,2285.23)
  Bottom Layer w8: v1(4506.02,2017.64) 4506.02,2023.57 4521.23,2038.77 v1@4521.23,2208.71 ; v1(6120,2285.23) 6315.23,2285.23 6355,2325 P2.1
MOD0E2: P2.2 TP5_M2.1 U1_M2.24 | length 1691
  Top Layer w8: U1_M2.24 v1(5196.02,2017.64) ; v1(5211.26,2208.74) 5247.52,2245 6020.93,2245 6079.2,2186.73 6253.27,2186.73 v1(6275,2165)
  Bottom Layer w8: v1(5196.02,2017.64) 5196.02,2023.57 5211.23,2038.77 v1@5211.23,2208.71 ; v1(6275,2165) 6375.53,2265.53 6470.53,2265.53 P2.2
MOD1E1: P2.3 TP4_M1.1 U1_M1.25 | length 2319
  Top Layer w8: U1_M1.25 v1(4480.43,2037.05) ; v1(4481.26,2188.74) 4497.76,2205.24 4497.76,2218.47 4506.26,2226.97 4506.26,2247.47 4608.79,2350 6064.42,2350 6099.42,2315 6340,2315 P2.3
  Bottom Layer w8: v1(4480.43,2037.05) 4480.43,2089.98 4481.23,2090.77 v1@4481.23,2188.71
MOD1E2: P2.5 TP4_M2.1 U1_M2.25 | length 1624.4
  Top Layer w8: U1_M2.25 v1(5170.43,2037.05) ; v1(5171.26,2188.74) 5187.76,2205.24 5187.76,2242.76 5205,2260 6027.14,2260 6085.41,2201.73 6283.27,2201.73 6301.5,2183.5 6301.5,2138.5 v1(6315,2125)
  Bottom Layer w8: v1(5170.43,2037.05) 5170.43,2089.98 5171.23,2090.77 v1@5171.23,2188.71 ; v1(6315,2125) P2.5
MOD2E1: P2.4 TP3_M1.1 U1_M1.26 | length 2468.6
  Top Layer w8: v1(4441.26,2208.74) 4597.52,2365 6070.64,2365 6105.64,2330 6348.74,2330 6403.74,2275 6480,2275 P2.4 ; U1_M1.26 v1(4454.84,2017.64)
  Bottom Layer w8: v1@4441.23,2208.71 4441.23,2031.25 v1(4454.84,2017.64)
MOD2E2: P2.6 TP3_M2.1 U1_M2.26 | length 1774.6
  Top Layer w8: v1(5131.26,2208.74) 5197.52,2275 6033.36,2275 6091.63,2216.73 6289.63,2216.73 6325,2181.36 v1(6325,2160) ; U1_M2.26 v1(5144.84,2017.64)
  Bottom Layer w8: v1@5131.23,2208.71 5131.23,2031.25 v1(5144.84,2017.64) ; v1(6325,2160) 6345,2180 6475,2180 P2.6
MOSI: P3.6 U2.15 | length 1090
  Top Layer w8: 6306.89,1601.89 6369.31,1539.47 6568.11,1539.47 6669.47,1640.83 6669.47,2030.83 6713.64,2075 6807.31,2075 6857.31,2125 P3.6
NetC1_M1_2: C1_M1.2 R1_M1.1 U1_M1.3 | length 197.9
  Top Layer w8: C1_M1.2@4316.18,1629.74 4380.04,1629.74 4454.84,1704.54 U1_M1.3
NetC1_M2_2: C1_M2.2 R1_M2.1 U1_M2.3 | length 197.9
  Top Layer w8: C1_M2.2@5006.18,1629.74 5070.04,1629.74 5144.84,1704.54 U1_M2.3
NetC2_M1_1: C2_M1.1 U1_M1.1 | length 218.5
  Top Layer w8: C2_M1.1@4258.74,1628.44 4258.74,1642.53 4285.95,1669.74 4376.62,1669.74 4403.66,1696.79 U1_M1.1@4403.66,1733.8
NetC2_M1_2: C2_M1.2 U1_M1.2 | length 266.8
  Top Layer w8: C2_M1.2@4258.74,1590.74 4283.74,1615.74 4283.74,1646.32 4292.16,1654.74 4382.83,1654.74 4429.25,1701.16 U1_M1.2@4429.25,1733.8
NetC2_M2_1: C2_M2.1 U1_M2.1 | length 218.5
  Top Layer w8: C2_M2.1@4948.74,1628.44 4948.74,1642.53 4975.95,1669.74 5066.62,1669.74 5093.66,1696.79 U1_M2.1@5093.66,1733.8
NetC2_M2_2: C2_M2.2 U1_M2.2 | length 266.8
  Top Layer w8: C2_M2.2@4948.74,1590.74 4973.74,1615.74 4973.74,1646.32 4982.16,1654.74 5072.83,1654.74 5119.25,1701.16 U1_M2.2@5119.25,1733.8
NetC3_M1_2: C3_M1.2 U1_M1.15 | length 71.5
  Top Layer w10: U1_M1.15 4736.34,2002.34 C3_M1.2
NetC3_M2_2: C3_M2.2 U1_M2.15 | length 71.5
  Top Layer w10: U1_M2.15 5426.34,2002.34 C3_M2.2
NetC4_M1_2: C4_M1.2 R2_M1.1 U1_M1.12 U1_M1.13 | length 204.6
  Top Layer w7: U1_M1.12 U1_M1.13 4710.75,1691.73 R2_M1.1@4808.27,1594.21
NetC4_M2_2: C4_M2.2 R2_M2.1 U1_M2.12 U1_M2.13 | length 204.6
  Top Layer w7: U1_M2.12 U1_M2.13 5400.75,1691.73 R2_M2.1@5498.27,1594.21
NetC5_M1_1: C5_M1.1 D1_M1.A M1_M1.4 U1_M1.5 | length 542.4
  Top Layer w15: 4490.76,1633.24 4490.76,1680.76 4506.02,1696.02
  Top Layer w39: M1_M1.4 D1_M1.A@4425,1366 ; D1_M1.A@4444,1420 4444,1586.48 4487,1629.48
NetC5_M2_1: C5_M2.1 D1_M2.A M1_M2.4 U1_M2.5 | length 542.4
  Top Layer w15: 5180.76,1633.24 5180.76,1680.76 5196.02,1696.02
  Top Layer w39: M1_M2.4 D1_M2.A@5115,1366 ; D1_M2.A@5134,1420 5134,1586.48 5177,1629.48
NetC6_M1_1: C6_M1.1 D2_M1.A M1_M1.3 U1_M1.7 | length 628.2
  Top Layer w12: 4557.2,1647.2 U1_M1.7
  Top Layer w18: 4535,1625 4557.2,1647.2
  Top Layer w39: M1_M1.3@4520,1120 4520,1210 4535,1225 4535,1625
NetC6_M2_1: C6_M2.1 D2_M2.A M1_M2.3 U1_M2.7 | length 628.2
  Top Layer w12: 5247.2,1647.2 U1_M2.7
  Top Layer w18: 5225,1625 5247.2,1647.2
  Top Layer w39: M1_M2.3@5210,1120 5210,1210 5225,1225 5225,1625
NetC7_M1_1: C7_M1.1 D3_M1.A M1_M1.1 U1_M1.10 | length 648.4
  Top Layer w12: 4633.98,1696.02 U1_M1.10
  Top Layer w15: 4633.98,1696.02 4651,1679 4651,1629
  Top Layer w39: 4651,1629 4701,1579 4701,1412.52 4720,1393.52 M1_M1.1@4720,1120
NetC7_M2_1: C7_M2.1 D3_M2.A M1_M2.1 U1_M2.10 | length 648.4
  Top Layer w12: 5323.98,1696.02 U1_M2.10
  Top Layer w15: 5323.98,1696.02 5341,1679 5341,1629
  Top Layer w39: 5341,1629 5391,1579 5391,1412.52 5410,1393.52 M1_M2.1@5410,1120
NetC10_M1_1: C10_M1.1 D4_M1.A M1_M1.2 U1_M1.8 | length 628.2
  Top Layer w12: 4582.8,1647.2 U1_M1.8
  Top Layer w18: 4582.8,1647.2 4605,1625
  Top Layer w39: 4605,1625 4605,1220 4620,1205 M1_M1.2@4620,1120
NetC10_M2_1: C10_M2.1 D4_M2.A M1_M2.2 U1_M2.8 | length 628.2
  Top Layer w12: 5272.8,1647.2 U1_M2.8
  Top Layer w18: 5272.8,1647.2 5295,1625
  Top Layer w39: 5295,1625 5295,1220 5310,1205 M1_M2.2@5310,1120
NetC11_2: C11.2 U2.5 X1.2 | length 173.3
  Top Layer w8: X1.2 5840,1811.93 5865.77,1786.16 C11.2 5930.77,1786.16 5941.3,1775.63 U2.5
NetC12_2: C12.2 U2.6 X1.1 | length 166.8
  Top Layer w8: X1.1 5836.77,1735.16 5857.56,1755.94 U2.6
NetD5_A: D5.A R8.1
NetD5_C: D5.C FETS.2 Q1.3
NetD6_A: D6.A R11.1
NetD6_C: D6.C FETS.4 Q2.3
NetD7_A: D7.A R14.1
NetD7_C: D7.C D8.1 FETS.6 Q3.5 TP12.1
NetD9_A: D9.A R17.1
NetD9_C: D9.C D10.1 FETS.8 Q4.5 TP13.1
NetF1_1: "FET PWR.1" F1.1
NetP4_2: P4.2 P5.2 U2.13
NetP4_4: P4.4 P5.1 U2.14
NetQ1_1: Q1.1 R9.2
NetQ2_1: Q2.1 R12.2
NetQ3_4: Q3.4 R15.2
NetQ4_4: Q4.4 R18.2
NetR3_M1_2: R3_M1.2 U1_M1.9 | length 394.7
  Top Layer w12: v3@4608.39,1676.61 U1_M1.9
  Top Layer w35: R3_M1.2 v3(4845,1780)
  Bottom Layer w35: v3(4615,1670) 4735,1670 v3(4845,1780)
NetR3_M2_2: R3_M2.2 U1_M2.9 | length 394.7
  Top Layer w12: v3@5298.39,1676.61 U1_M2.9
  Top Layer w35: R3_M2.2 v3(5535,1780)
  Bottom Layer w35: v3(5305,1670) 5425,1670 v3(5535,1780)
NetR4_M1_2: R4_M1.2 U1_M1.6 | length 394.7
  Top Layer w12: v3@4531.61,1676.61 U1_M1.6
  Top Layer w35: R4_M1.2 v3(4295,1780)
  Bottom Layer w35: v3(4295,1780) 4405,1670 v3(4525,1670)
NetR4_M2_2: R4_M2.2 U1_M2.6 | length 394.7
  Top Layer w12: v3@5221.61,1676.61 U1_M2.6
  Top Layer w35: R4_M2.2 v3(4985,1780)
  Bottom Layer w35: v3(4985,1780) 5095,1670 v3(5215,1670)
NetR9_1: R9.1 R10.1 U3.13
NetR12_1: R12.1 R13.1 U3.12
NetR15_1: R15.1 R16.1 U3.11
NetR18_1: R18.1 R19.1 U3.10
NetT1_TC1_1: T1_TC1.1 U4_TC1.3
NetT1_TC1_2: T1_TC1.2 U4_TC1.2
NetT1_TC2_1: T1_TC2.1 U4_TC2.3
NetT1_TC2_2: T1_TC2.2 U4_TC2.2
NetU2_11: U2.11
PWM0: TP8.1 U2.21 U3.2
PWM1: TP9.1 U2.20 U3.3
PWM2: TP10.1 U2.19 U3.4
PWM3: TP11.1 U2.10 U3.5
PWM4: U2.9
REF1: P2.13 R2_M1.2 TP1_M1.1
REF2: P2.14 R2_M2.2 TP1_M2.1
RESET: C15.2 JTAG/DEBUG1.10 R7.1 S1.1 U2.23
RXD0: P3.8 P4.1
SCLK: P3.3 U2.17 | length 1038.3
  Top Layer w8: 6295,1680 6390.53,1584.47 6549.47,1584.47 6624.47,1659.47 6624.47,2049.47 P3.3
STEP1: P2.7 TP7_M1.1 U1_M1.22 | length 2344
  Top Layer w8: U1_M1.22 v1(4557.2,2017.64) ; v1(4561.26,2188.74) 4561.26,2198.69 4682.57,2320 6052,2320 6110.27,2261.73 6308.27,2261.73 6389.47,2180.53 6389.47,2065.53 P2.7
  Bottom Layer w8: v1@4557,2017.84 v1(4557.2,2017.64) 4557.2,2086.75 4561.23,2090.77 v1@4561.23,2180.77
STEP2: P2.8 TP7_M2.1 U1_M2.22 | length 1605
  Top Layer w8: U1_M2.22 v1(5247.2,2017.64) ; v1(5251.26,2188.74) 5251.26,2193.69 5282.57,2225 6019.72,2225 6072.99,2171.73 6198.27,2171.73 v1(6275,2095)
  Bottom Layer w8: v1@5247,2017.84 v1(5247.2,2017.64) 5247.2,2086.75 5251.23,2090.77 v1@5251.23,2180.77 ; v1(6275,2095) 6315,2095 6330,2080 6475,2080 P2.8
SWD_CLK: JTAG/DEBUG1.4 R6.1 U2.22
SWD_DIO: JTAG/DEBUG1.2 R5.2 U2.24
TC_CS1: TP14.1 U2.7 U4_TC1.6
TC_CS2: TP15.1 U2.2 U4_TC2.6
TC_MISO: U2.8 U4_TC1.7 U4_TC2.7
TC_SCLK: U2.12 U4_TC1.5 U4_TC2.5
TXD0: P3.7 P4.3
pads on no net: FD1.1 FD2.1 FD3.1 H1.0 H2.0 H3.0 H4.0 JTAG/DEBUG1.6 JTAG/DEBUG1.7 JTAG/DEBUG1.8 P5.3 S1.3 S1.4 U1_M1.18 U1_M1.19 U1_M1.23 U1_M1.27 U1_M2.18 U1_M2.19 U1_M2.23 U1_M2.27 U2.1 U3.6 U3.9 U3.15 U4_TC1.8 U4_TC2.8 U5.4 U5.5 U5.8
copper on no net:
  other v2: 11113.35,4348.35 11156.65,4348.35 11113.35,4391.65 11156.65,4391.65

## Polygon pours and split planes (outlines as drawn)
NetD7_C on Top Layer "Mechanical 15-No Net" (solid, remove dead copper, pour order 80): 6065,2760 6065,2675 6140,2675 6140,2735 6200,2735 6340,2735 6340,2745 6415,2745 6415,3510 6170,3510 6170,2955 6145,2955 6145,2875 6145,2815 6125,2815 6125,2760
NetD9_C on Top Layer "Mechanical 15-No Net" (solid, pour order 81): 6465,2760 6465,2675 6540,2675 6540,2735 6600,2735 6740,2735 6740,2745 6815,2745 6815,3510 6570,3510 6570,2955 6545,2955 6545,2875 6545,2815 6525,2815 6525,2760
+12VCC2 on Top Layer "Mechanical 15-No Net" (solid, remove dead copper, pour order 61): 6020,3505 6020,2880 6140,2880 6140,2960 6165,2960 6165,3505
+12VCC2 on Top Layer "Mechanical 15-No Net" (solid, remove dead copper, pour order 63): 6420,3505 6420,2880 6540,2880 6540,2960 6565,2960 6565,3505

## Text inside footprints (layer, text, board x,y; h text height)
"FET PWR": Top Overlay "2" at 3560,2020 h77.5 r270; Top Overlay "1" at 3560,2205 h77.5 r270
FETS: Top Overlay "4" at 5800,3230 h77.5; Top Overlay "3" at 5600,3230 h77.5; Top Overlay "2" at 5400,3230 h77.5; Top Overlay "1" at 5215,3230 h77.5; Top Overlay "5" at 6000,3230 h77.5; Top Overlay "6" at 6200,3230 h77.5; Top Overlay "7" at 6400,3230 h77.5; Top Overlay "8" at 6600,3230 h77.5
"MTR PWR": Top Overlay "2" at 3560,1555 h77.5 r270; Top Overlay "1" at 3560,1740 h77.5 r270
P4: Top Overlay "1" at 7955,1890 h50 r90; Top Overlay "2" at 7855,1870 h50 r90; Top Overlay "4" at 7855,2130 h50 r90; Top Overlay "3" at 7955,2130 h50 r90
T1_TC1: Mechanical 16 "1" at 7937.5,6117.5 h62
T1_TC2: Mechanical 16 "1" at 7977.5,6587.5 h62